# EAGLE board Esquema 01 guilherme (EAGLE 9.6.2)
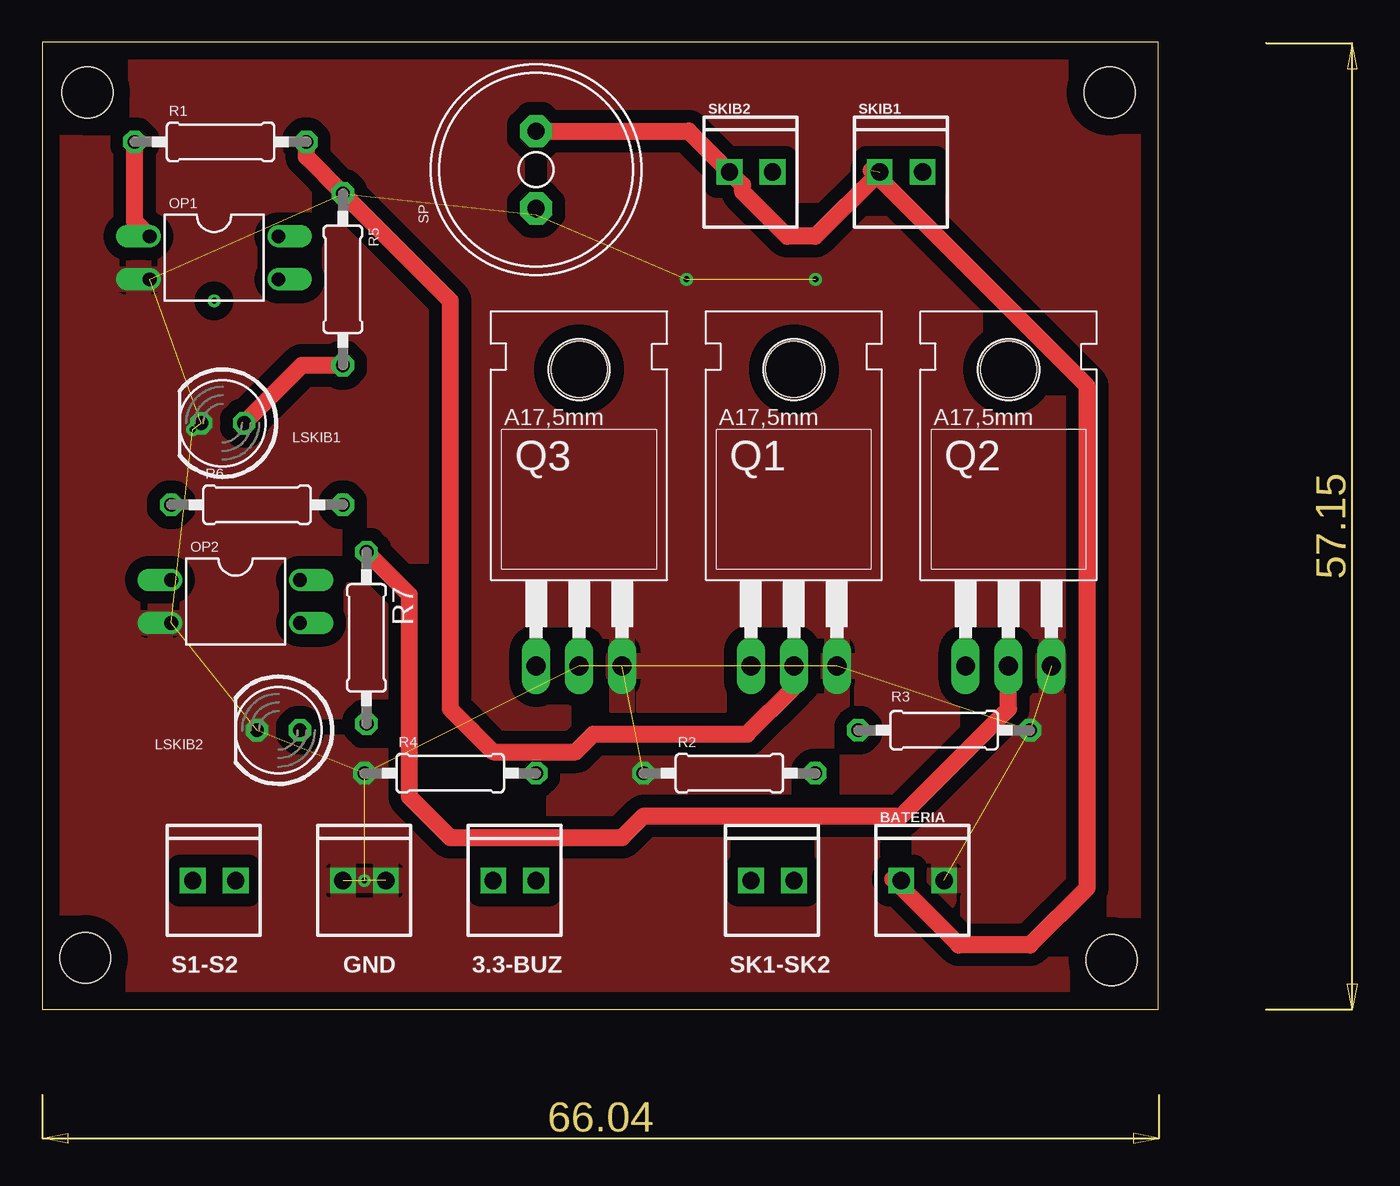
[diagram p0: board, top side]
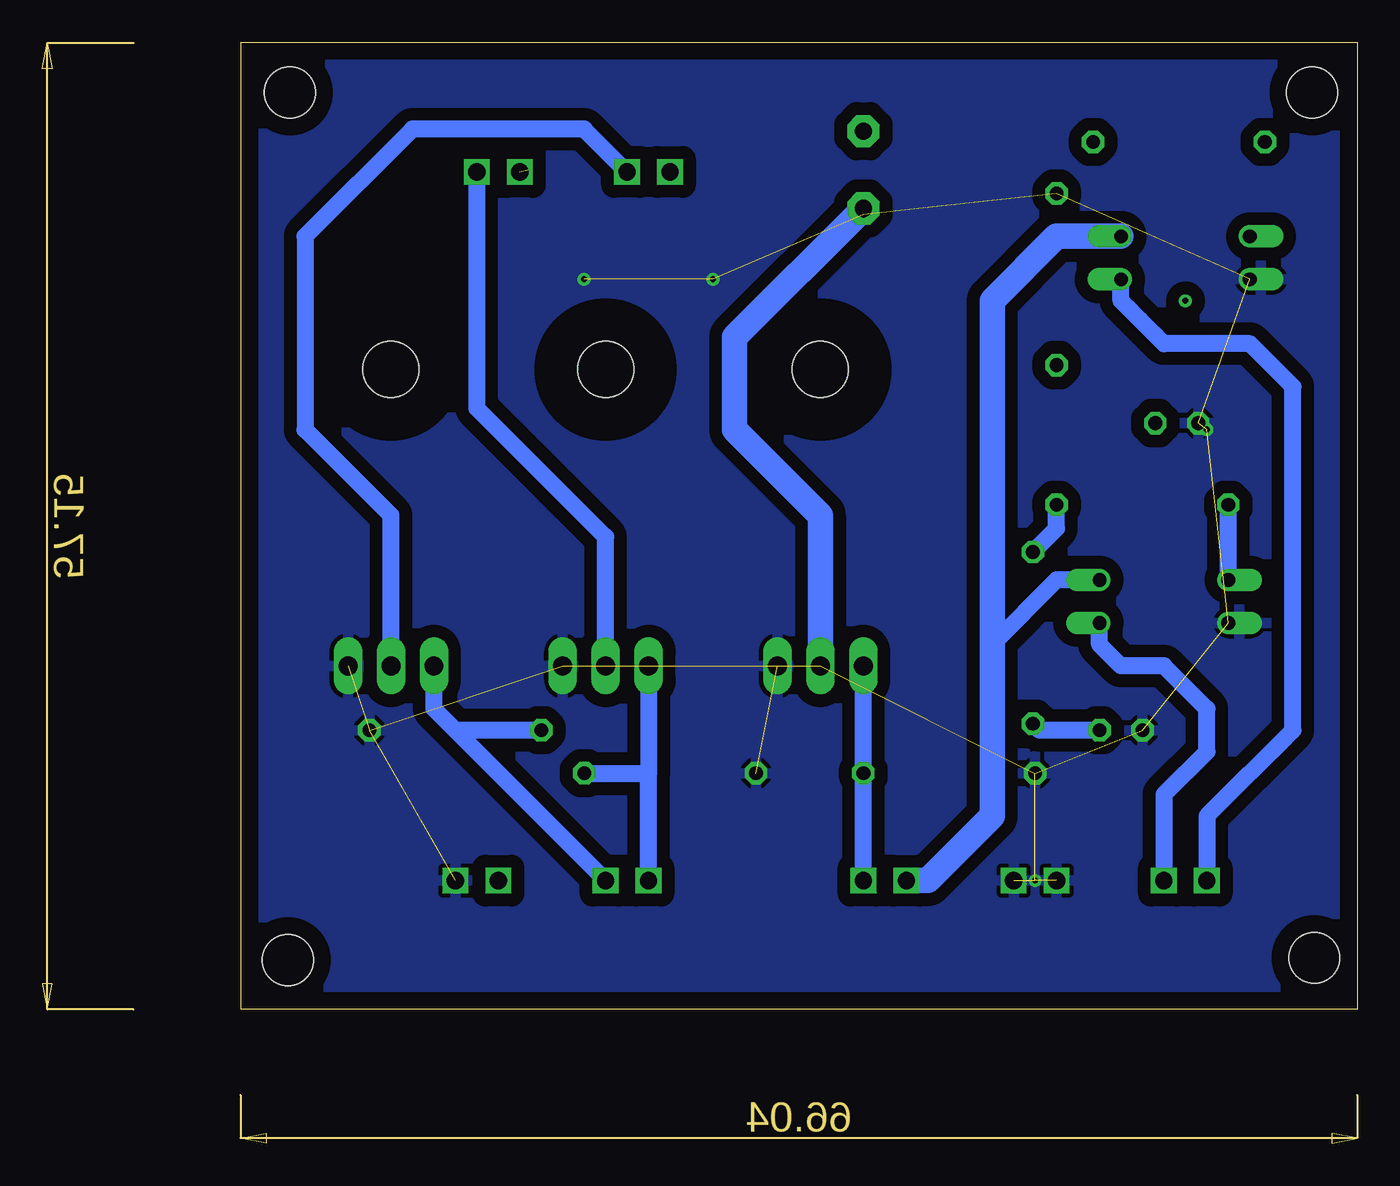
[diagram p1: board, bottom side, seen from below]

Size 66.02 x 57.2 mm. Coordinates in mm from the lower left corner, seen from the top.
Outline: 0,0 66.02,0 66.02,57.2 0,57.2 0,0
Copper layers (1*16): Top 0.035mm / dielectric 1.5mm / Bottom 0.035mm
Design rules "default *": minimum track width 1mm, minimum drill 0.35mm, track to track 30mil, track to pad 0.5mm, pad to pad 6mil, via to via 6mil, smd to smd 6mil, copper to edge 40mil, drill to drill 6mil, minimum pad ring 10mil, minimum via ring 8mil, stop-mask expansion 4mil, vias tented up to drill 1mm, thermal gap 10mil
Holes 3 mm at 2.67,54.23 63.12,54.23 2.54,3.05 63.25,2.92

## Footprints (pad centres in the part's own frame; a part is rotated, then mirrored left to right if it is on the bottom)
1X02_2.54_SCREWTERM = drill 1.016 square: P1 2.54,0; P2 0,0
LED5MM = drill 0.813 octagon: A -1.27,0; K 1.27,0
DIL04 = drill 0.813 offset: 1 -1.27,-3.81; 2 1.27,-3.81; 3 1.27,3.81; 4 -1.27,3.81
TO220 = drill 1.118 long: 1 -2.54,-6.35; 2 0,-6.35; 3 2.54,-6.35 | hole 3.302: 0,11.176
0207/10 = drill 0.813 octagon: 1 -5.08,0; 2 5.08,0
AL11P = drill 1.016 pad 1.905 octagon: + 2.286,0; - -2.286,0

## Placement (x,y rotation side)
3.3-BUZ  [1X02_2.54_SCREWTERM]  26.67,7.62 0 top
BATERIA  [1X02_2.54_SCREWTERM]  50.8,7.62 0 top
GND  [1X02_2.54_SCREWTERM]  17.78,7.62 0 top
LSKIB1  5mm  [LED5MM]  10.67,34.67 180 top
LSKIB2  5mm  [LED5MM]  13.97,16.51 180 top
OP1  PC817  [DIL04]  10.16,44.45 270 top
OP2  PC817  [DIL04]  11.43,24.13 270 top
Q1  IRF540  [TO220]  44.45,26.67 0 top
Q2  IRF540  [TO220]  57.15,26.67 0 top
Q3  IRF540  [TO220]  31.75,26.67 0 top
R1  1k  [0207/10]  10.54,51.31 0 top
R2  1k  [0207/10]  40.64,13.97 0 top
R3  1k  [0207/10]  53.34,16.51 180 top
R4  1k  [0207/10]  24.13,13.97 0 top
R5  1k  [0207/10]  17.78,43.18 270 top
R6  1k  [0207/10]  12.7,29.84 0 top
R7  1k  [0207/10]  19.18,21.97 270 top
S1-S2  [1X02_2.54_SCREWTERM]  8.89,7.62 0 top
SK1-SK2  [1X02_2.54_SCREWTERM]  41.91,7.62 0 top
SKIB1  [1X02_2.54_SCREWTERM]  49.53,49.53 0 top
SKIB2  [1X02_2.54_SCREWTERM]  40.64,49.53 0 top
SP  AL11P  [AL11P]  29.21,49.66 90 top

## Library data of the parts
3.3-BUZ BATERIA GND S1-S2 SK1-SK2 SKIB1 SKIB2 = SparkFun-Connectors
LSKIB1 LSKIB2 = led
OP1 OP2 = optocoupler; MPN: PC817X4J000F; OC_FARNELL: 9707727; OC_NEWARK: 97K7059
Q1-Q3 = transistor-fet
R1-R7 = rcl; SPICEPREFIX: R
SP = buzzer; OC_FARNELL: unknown; OC_NEWARK: unknown

## Nets
3.3V: 3.3-BUZ.P2 OP1.4 OP2.4
BUZZER: 3.3-BUZ.P1 Q3.1 R4.2
GND: BATERIA.P1 GND.P1 GND.P2 LSKIB1.K LSKIB2.K OP1.2 OP2.2 Q1.3 Q2.3 Q3.3 R2.1 R3.1 R4.1
N$1: LSKIB2.A R7.2
N$2: Q3.2 SP.-
N$3: LSKIB1.A R5.2
N$4: OP1.1 R1.1
N$5: OP2.1 R6.1
SINAL_SKIB1: OP1.3 S1-S2.P2
SINAL_SKIB2: OP2.3 S1-S2.P1
SKIB1: Q1.1 R2.2 SK1-SK2.P2
SKIB1_CONECTOR: Q1.2 R1.2 R5.1 SKIB1.P1
SKIB2: Q2.1 R3.2 SK1-SK2.P1
SKIB2_CONECTOR: Q2.2 R6.2 R7.1 SKIB2.P1
VCC: BATERIA.P2 SKIB1.P2 SKIB2.P2 SP.+

## Tracks (layer width: path | path; a pad name or v marks a point on that pad's centre or on a via)
3.3V
  Bottom 1: 21.59,21.59 17.78,25.4 OP2.4
  Bottom 1.5: 3.3-BUZ.P2 25.4,7.62 21.59,11.43 21.59,21.59 21.59,41.91 17.78,45.72 OP1.4
BUZZER
  Bottom 1: 3.3-BUZ.P1 R4.2 Q3.1
GND  (via drill 0.35)  (19 unrouted)
  other vias: 19.05,7.62 19.05,7.62 8.89,34.29 6.35,43.18 17.78,48.26 29.21,46.99 45.72,43.18 31.75,20.32 38.1,43.18 34.29,20.32 46.99,20.32 58.42,16.51 35.56,13.97 8.89,34.29
  pour Bottom: 0.38,56.77 0.38,0.38 65.66,0.38 65.66,56.77
  pour Top: 0,57.15 66.04,57.15 66.04,0 0,0
N$1
  Bottom 1: R7.2 18.8,16.51 LSKIB2.A
N$2
  Bottom 1.5: SP.- 36.83,39.75 36.83,34.29 31.75,29.21 Q3.2
N$3
  Top 1: LSKIB1.A 15.37,38.1 R5.2
N$4
  Top 1: OP1.1 5.46,46.61 R1.1
N$5
  Bottom 1: OP2.1 R6.1
N$8  (via drill 0.35)
  other vias: 10.16,41.91
SINAL_SKIB1
  Bottom 1: OP1.3 13.97,41.91 11.43,39.37 6.35,39.37 3.81,36.83 3.81,16.51 8.89,11.43 S1-S2.P2
SINAL_SKIB2
  Bottom 1: OP2.3 15.24,21.59 13.97,20.32 11.43,20.32 8.89,17.78 8.89,15.24 11.43,12.7 S1-S2.P1
SKIB1
  Bottom 1: SK1-SK2.P2 41.91,13.97
  Bottom 1.016: R2.2 41.91,13.97 Q1.1
SKIB1_CONECTOR
  Top 1: R1.2 15.62,50.42 R5.1 24.13,41.91 24.13,17.78 25.4,16.51
  Top 1.016: 25.4,16.51 26.67,15.24 31.55,15.24 32.59,16.28 41.68,16.28 44.45,19.05 Q1.2
  Bottom 1: SKIB1.P1 52.07,35.56 44.45,27.94 Q1.2
SKIB2
  Bottom 1: Q2.1 54.61,17.78 53.34,16.51 SK1-SK2.P1
  Bottom 1.016: R3.2 53.34,16.51
SKIB2_CONECTOR
  Top 1: Q2.2 57.15,17.78 50.8,11.43 35.56,11.43 34.29,10.16 24.13,10.16 21.72,12.57 21.72,24.51 R7.1
  Bottom 1: Q2.2 57.15,29.21 62.23,34.29 62.23,45.72 55.88,52.07 45.72,52.07 SKIB2.P1 | R7.1 17.78,28.45 R6.2
VCC  (1 unrouted)
  Top 1: SP.+ 38.23,51.94 SKIB2.P2 41.42,48.75 41.42,48.35 44.05,45.72 45.72,45.72 SKIB1.P2 | 49.04,49.62 61.8,36.86 61.8,7.19 58.42,3.81 54.21,3.81 50.31,7.71 50.71,7.71 BATERIA.P2